# Altium PCB PCB1.PcbDoc
Units mil, origin at the board's own origin, x right, y up, seen from the top; angles counter-clockwise.
Board outline 2755 x 1775 mil, 2 copper layers (Top Layer, Bottom Layer); 43 components, 27 nets, 129 pads, 27 vias.
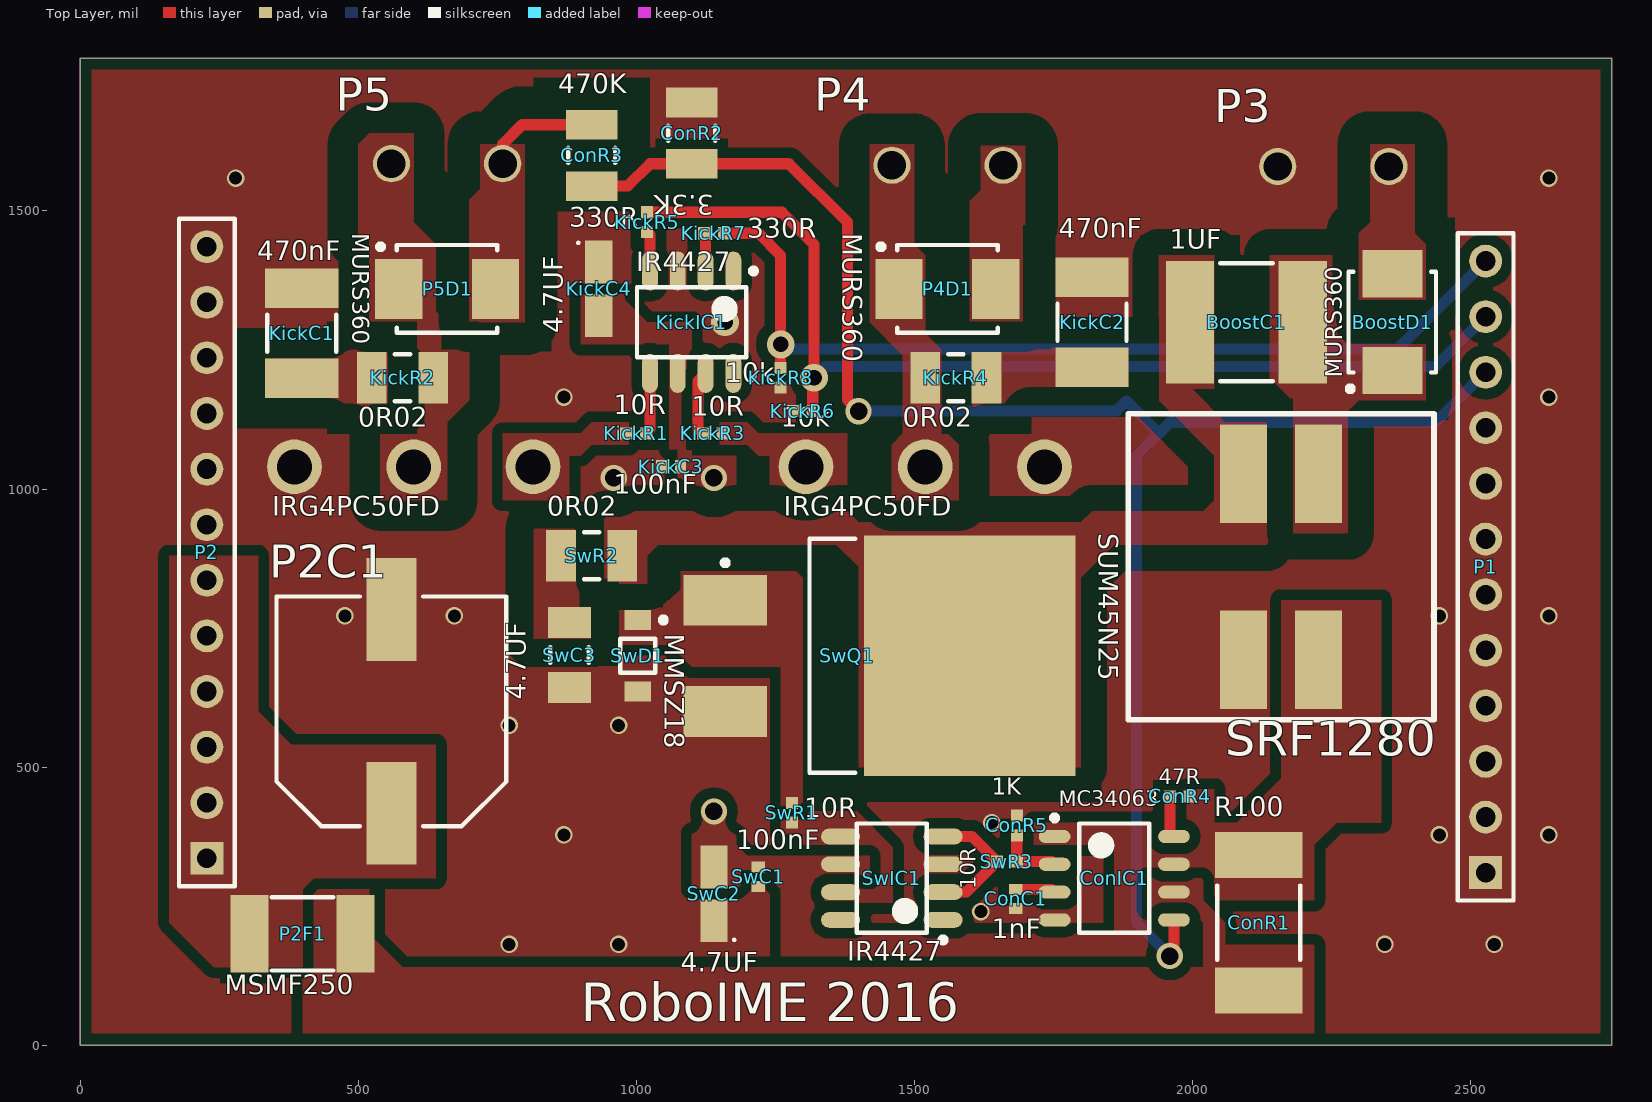
[diagram p0: Top Layer view]
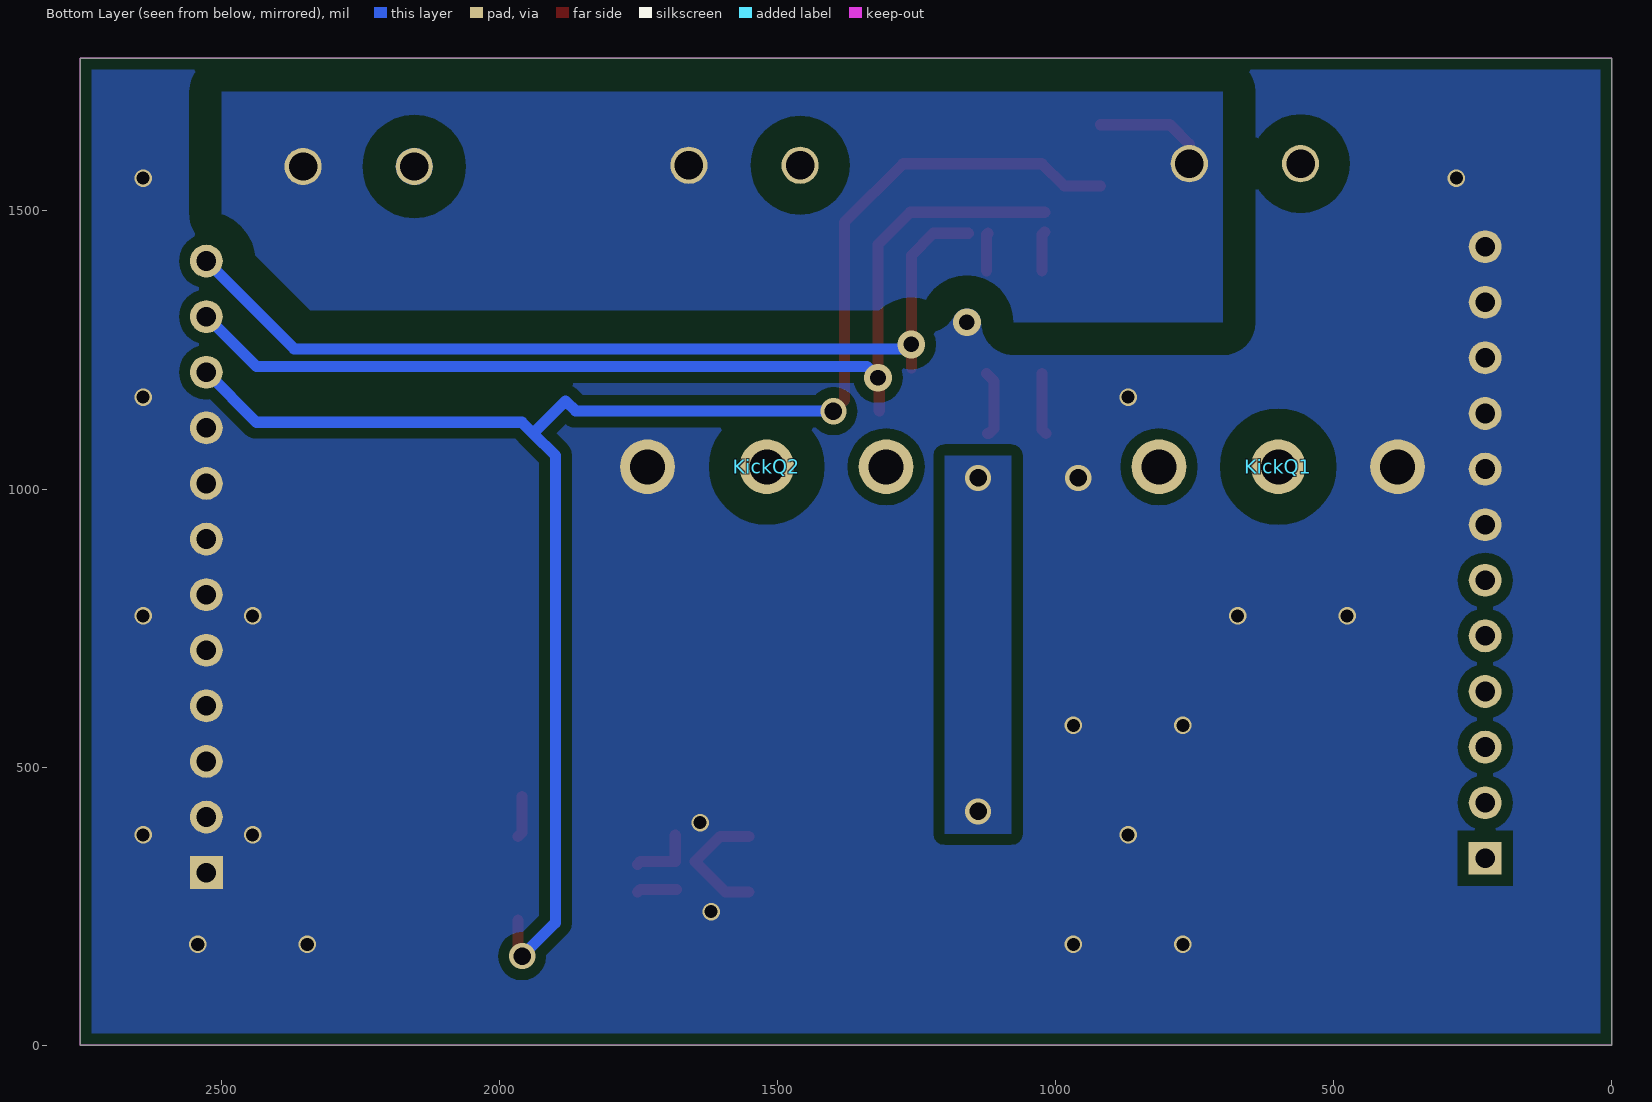
[diagram p1: Bottom Layer view, seen from below]

## Layer stack, top to bottom
Top Solder: solder mask 0.4, Solder Resist, Dk 3.5
Top Layer: signal copper 1.4
Dielectric 1: dielectric 12.6, FR-4, Dk 4.8
Bottom Layer: signal copper 1.4
Bottom Solder: solder mask 0.4, Solder Resist, Dk 3.5

## Board outline
0,0 2755,0 2755,1775 0,1775

## Design rules (kind name [scope] priority, off if disabled: settings)
Clearance Clearance_9 [InNet('KICK_REF')] p1: gap=19.68 ignorepadtopadclearanceinfootprint=FALSE except(0: Arc-Hole Track-Hole SMDPad-Hole THPad-Hole Via-Hole Fill-Hole Poly-Hole Region-Hole Text-Hole)
Clearance Clearance_8 [InNet('NetKickC2_2')] p2: gap=55.12 ignorepadtopadclearanceinfootprint=FALSE except(0: Arc-Hole Track-Hole SMDPad-Hole THPad-Hole Via-Hole Fill-Hole Poly-Hole Region-Hole Text-Hole)
Clearance Clearance_7 [InNet('NetKickC1_2')] p3: gap=55.12 ignorepadtopadclearanceinfootprint=FALSE except(0: Arc-Hole Track-Hole SMDPad-Hole THPad-Hole Via-Hole Fill-Hole Poly-Hole Region-Hole Text-Hole)
Clearance Clearance_6 [InNet('CHIP_KICK-')] p4: gap=55.12 ignorepadtopadclearanceinfootprint=FALSE except(0: Arc-Hole Track-Hole SMDPad-Hole THPad-Hole Via-Hole Fill-Hole Poly-Hole Region-Hole Text-Hole)
Clearance Clearance_5 [InNet('KICK-')] p5: gap=55.12 ignorepadtopadclearanceinfootprint=FALSE except(0: Arc-Hole Track-Hole SMDPad-Hole THPad-Hole Via-Hole Fill-Hole Poly-Hole Region-Hole Text-Hole)
Clearance Clearance_4 [InNet('NetSwC3_2')] p6: gap=51.18 ignorepadtopadclearanceinfootprint=FALSE except(0: Arc-Hole Track-Hole SMDPad-Hole THPad-Hole Via-Hole Fill-Hole Poly-Hole Region-Hole Text-Hole)
Clearance Clearance_3 [InNet('NetBoostC1_1')] p7: gap=47.24 ignorepadtopadclearanceinfootprint=FALSE except(0: Arc-Hole Track-Hole SMDPad-Hole THPad-Hole Via-Hole Fill-Hole Poly-Hole Region-Hole Text-Hole)
Clearance Clearance_2 [InNet('SEPIC')] p8: gap=47.24 ignorepadtopadclearanceinfootprint=FALSE except(0: Arc-Hole Track-Hole SMDPad-Hole THPad-Hole Via-Hole Fill-Hole Poly-Hole Region-Hole Text-Hole)
Clearance [InNet('CAP+')] p9: gap=59.06 ignorepadtopadclearanceinfootprint=FALSE except(0: Arc-Hole Track-Hole SMDPad-Hole THPad-Hole Via-Hole Fill-Hole Poly-Hole Region-Hole Text-Hole)
Clearance Clearance_1 [All] p10: gap=11.81 ignorepadtopadclearanceinfootprint=FALSE except(0: Arc-Hole Track-Hole SMDPad-Hole THPad-Hole Via-Hole Fill-Hole Poly-Hole Region-Hole Text-Hole; 19.68: Arc-Poly Track-Poly SMDPad-Poly THPad-Poly Via-Poly Fill-Poly Poly-Poly Poly-Region Poly-Text)
MinimumSolderMaskSliver [All] p1 off: minsoldermaskwidth=10
PolygonConnect PolygonConnect_1 [InNetClass('DIRECT')] p1: connectstyle=Direct reliefconductorwidth=10 reliefentries=4 polygonreliefangle="90 Angle" airgapwidth=10
PolygonConnect [All] p2: connectstyle=Direct reliefconductorwidth=20 reliefentries=4 polygonreliefangle="90 Angle" airgapwidth=11.81
RoutingVias [All] p1: holewidth=28 width=50 viastyle="Through Hole" minholewidth=28 minwidth=50 maxholewidth=28 maxwidth=50
SilkToSilkClearance [All] p1 off: silktosilkclearance=10
SilkToSolderMaskClearance [IsPad] p1 off: minsilkscreentomaskgap=10 clearancetoexposedcopper=TRUE
SolderMaskExpansion [All] p1: expansion=4
Width [All] p1: maxlimit=30 minlimit=10 preferedwidth=20
27 further rules are at their usual default settings.

## Classes and differential pairs
net class DIRECT: CAP+ CHIP_KICK- GND KICK- NetBoostC1_1 NetP2_1 NetSwC3_2 SEPIC V+ VIN

## Components (designator, comment, footprint, x,y, rotation, side; value= is the part's Value field where it differs from the comment)
BoostC1 "1UF" CAP-2220 2097.64,1300 r0 top
BoostD1 "MURS360" ONSC-SMB-2-403A-03_V 2360,1300 r90 top
ConC1 "1nF" CAP-0402 1682.67,262.68 r90 top
ConIC1 "MC34063" SOIC8-STM 1860,300 r0 top
ConR1 "R100" "RES-2512 BOURNS CRA" 2120,220 r270 top
ConR2 "3.3K" RES-1206 1100,1640 r270 top
ConR3 "470K" RES-1206 920,1600 r90 top
ConR4 "47R" RES-0402 1977.72,447.02 r0 top
ConR5 "1K" RES-0402 1684.64,394.9 r270 top
KickC1 "470nF" "CAP-1812 TDK" 398.73,1280 r270 top
KickC2 "470nF" "CAP-1812 TDK" 1820,1300 r270 top
KickC3 "100nF" CAP-0402 1062.68,1040 r0 top
KickC4 "4.7UF" "CAP Tant 1206 Kemet" 932.51,1360 r90 top
KickIC1 "IR4427" SOIC8-INFINEON 1100,1300 r270 top
KickQ1 "IRG4PC50FD" TO-247AC 600,1040 r180 bottom
KickQ2 "IRG4PC50FD" TO-247AC 1520,1040 r0 bottom
KickR1 "10R" RES-0402 1000,1100 r180 top
KickR2 "0R02" RES-1206 580,1200 r0 top
KickR3 "10R" RES-0402 1137.72,1100 r0 top
KickR4 "0R02" RES-1206 1575.12,1200 r180 top
KickR5 "330R" RES-0402 1020,1480 r270 top value=330
KickR6 "10k" RES-0402 1300,1140 r0 top value=10K
KickR7 "330R" RES-0402 1140,1460 r180 top value=330
KickR8 "10k" RES-0402 1260,1200 r90 top value=10K
P1 "Header 12" HDR1X12 2527.95,310 r90 top
P2 "Header 12" HDR1X12 227.95,335.83 r90 top
P2C1 "EEE-FK1C681GP" "Cap Al Size G - Panasonic" 560,600 r90 top
P2F1 "MSMF250" "1812-MSMF Bourns2" 400,200 r0 top
P3 "Cap" "Term Block 2P" 2254.01,1580 r0 top
P4 "OSTTA024163" "Term Block 2P" 1560,1582.24 r0 top
P4D1 "MURS360" ONSC-SMB-2-403A-03_V 1560,1360 r0 top
P5 "OSTTA024163" "Term Block 2P" 660,1585.15 r0 top
P5D1 "MURS360" ONSC-SMB-2-403A-03_V 660,1360 r0 top
SRF1280 "SRF1280-100M" SRF1280-100M-PCB 2160,860 r180 top
SwC1 "100nF" CAP-0402 1220,302.68 r90 top
SwC2 "4.7UF" "CAP Tant 1206 Kemet" 1140,271.77 r270 top
SwC3 "4.7UF" "CAP-1206 KEMET" 880,701.34 r90 top
SwD1 "MMSZ18" ONSC-SOD-123-2-425-04_V 1003.18,700 r270 top
SwIC1 "IR4427" SOIC8-INFINEON 1460,300 r180 top
SwQ1 "SUM45N25" "TO-263 Vishay" 1406.3,700 r0 top
SwR1 "10R" RES-0402 1280,417.72 r90 top
SwR2 "0R02" RES-1206 920,880 r0 top
SwR3 "10R" RES-0402 1666.92,329.77 r180 top

## Footprints (in the part's own frame and the unit in brackets; to place one, negate y for a bottom-side part, rotate by r counter-clockwise, add the part's x,y. Pads: shape width x height; smd on the part's side, far side on the other; paste and mask are expansions set on the pad)
"1812-MSMF Bourns2" [mm] "Chip Diode, 2-Leads, Body 4,60x3,24mm, IPC Medium Density"
  rect 1.73x3.55 smd: 1(-2.415,0) 2(2.415,0)
  silkscreen extent -1.4,-1.68 1.4,1.68, body extent -2.3,-1.62 2.3,1.62, height 1.15
"Cap Al Size G - Panasonic" [mm] "Aluminum Electrolytic Capacitor, Body 10,30x10,30x10,50mm, IPC Low Density"
  rect 4.7x2.3 smd: 1(-4.65,0) 2(4.65,0)
  silkscreen extent -5.25,-5.25 5.25,5.25, body extent -5.65,-5.21 5.65,5.09, height 10.41
"CAP Tant 1206 Kemet" [mm] "Molded Capacitor, 2-Leads, Body 3,20x1,60mm, IPC Medium Density"
  rect 1.95x1.25 smd: 1(-1.225,0) 2(1.225,0)
  silkscreen extent 2.05,0.87 2.15,0.97, body extent -1.7,-0.9 1.7,0.9, height 1.8
CAP-0402 [mm]
  rect 0.5x0.62 smd: 1(-0.44,0) 2(0.44,0)
  body extent -0.53,-0.28 0.53,0.27, height 0.55
"CAP-1206 KEMET" [mm] "Chip Resistor, 2-Leads, Body 3,20x1,60mm, IPC Medium Density"
  rect 1.42x1.96 smd: 1(-1.49,0) 2(1.49,0)
  silkscreen extent -0.35,-0.88 0.35,0.88, body extent -1.7,-0.9 1.7,0.9, height 1.75
"CAP-1812 TDK" [mm] "Chip Capacitor, 2-Leads, Body 4,60x3,20mm, IPC Medium Density"
  rect 1.8x3.35 smd: 1(-2.05,0) 2(2.05,0)
  silkscreen extent -0.85,-1.58 0.85,1.58, body extent -2.3,-1.6 2.3,1.6, height 3.2
CAP-2220 [mm] "Chip Capacitor, 2-Leads, Body 5,75x5,00mm, IPC Medium Density"
  rect 2.2x5.6 smd: 1(-2.575,0) 2(2.575,0)
  silkscreen extent -1.2,-2.7 1.2,2.7, body extent -3.1,-2.7 3.1,2.7, height 2.5
HDR1X12 [mm] "Connector; Header; 12 Position"
  rect 1.5x1.5 hole 0.9: 1(0,0)
  round 1.5 hole 0.9: 2(2.54,0) 3(5.08,0) 4(7.62,0) 5(10.16,0) 6(12.7,0) 7(15.24,0) 8(17.78,0) 9(20.32,0) 10(22.86,0) 11(25.4,0) 12(27.94,0)
  silkscreen extent -1.27,-1.27 29.21,1.27
ONSC-SMB-2-403A-03_V [mil] "Molded, 2-Leads, Body 4.6x3.95mm"
  rect 85x107.99 smd: 1(-87.01,0) 2(87.01,0)
  silkscreen extent -125,-79 91,81, body extent -91,-78 91,78, height 97
ONSC-SOD-123-2-425-04_V [mm] "SOD, 2-Leads, Body 2.69x1.6mm"
  rect 0.91x1.22 smd: 1(-1.635,0) 2(1.635,0)
  silkscreen extent -1.76,-0.8 0.78,1.29, body extent -1.35,-0.8 1.35,0.8, height 1.35
RES-0402 [mm]
  rect 0.55x0.55 smd: 1(-0.45,0) 2(0.45,0)
  body extent -0.53,-0.27 0.53,0.28, height 0.4
RES-1206 [mm]
  rect 1.35x2.35 smd: 1(-1.4,0) 2(1.4,0)
  silkscreen extent -0.35,-1.08 0.35,1.07, body extent -1.73,-0.67 1.73,0.67, height 0.45
"RES-2512 BOURNS CRA" [mm] "Chip Resistor, 2-Leads, Body 6,45x3,35mm, IPC Medium Density"
  rect 2.1x4 smd: 1(-3.1,0) 2(3.1,0)
  silkscreen extent -1.7,-1.9 1.7,1.9, body extent -3.32,-1.57 3.33,1.58, height 0.9
SOIC8-INFINEON [mm] "SOIC, 8-Leads, Body 4,89x3,90mm, Pitch 1,27mm, IPC Medium Density"
  oval 1.78x0.72 smd: 1(-2.34,1.905) 2(-2.34,0.635) 3(-2.34,-0.635) 4(-2.34,-1.905) 5(2.34,-1.905) 6(2.34,-0.635) 7(2.34,0.635) 8(2.34,1.905)
  silkscreen extent -2.46,-2.5 1.6,2.94, body extent -2,-2.5 2,2.5, height 1.75
SOIC8-STM [mm] "SOIC, 8-Leads, Body 4,90x3,90mm, Pitch 1,27mm, IPC Medium Density"
  oval 1.45x0.6 smd: 1(-2.725,1.905) 2(-2.725,0.635) 3(-2.725,-0.635) 4(-2.725,-1.905) 5(2.725,-1.905) 6(2.725,-0.635) 7(2.725,0.635) 8(2.725,1.905)
  silkscreen extent -2.85,-2.5 1.6,2.88, body extent -2,-2.5 2,2.5, height 1.75
SRF1280-100M-PCB [mm]
  rect 2.15x4.5 smd: 1(1.715,4.25) 2(-1.715,4.25) 3(-1.715,-4.25) 4(1.715,-4.25)
  silkscreen extent -6.99,-6.99 6.99,6.99, body extent -6.25,-6.12 6.25,6.38, height 7.8
"Term Block 2P" [mm]
  round 1.7 hole 1.3: 1(-2.54,0) 2(2.54,0)
  body extent -5.64,-3.1 4.96,4.5, height 10
TO-247AC [mm]
  round 2.5 hole 1.6: 1(-5.45,0) 2(0,0) 3(5.45,0)
  body extent -7.75,-24.89 7.75,0.51, height 8
"TO-263 Vishay" [mm] "D2-PAK, 3-Pads, Body 7,93x8,69mm (max), IPC Medium Density"
  rect 3.81x2.32 smd: 1(-6.25,2.54) 3(-6.25,-2.54)
  rect 9.65x11 smd: 2(4.92,0)
  silkscreen extent -6.37,-5.35 -0.31,5.35, body extent -6.5,-4.91 8.09,4.91, height 4.22

## Part data
BoostC1: library part "Cap 1UF 2220 450V", "1µF 450V Ceramic Capacitor X7T 2220 (5750 Metric) 0.224\" L x 0.197\" W (5.70mm x 5.00mm)"
BoostD1 P4D1 P5D1: library part CMP-0902-00327-1, "Surface Mount Ultrafast Power Rectifier, 2-Pin SMB, Pb-Free, Tape and Reel"
ConC1: library part "Cap 1nF 0402", "1000pF 50V Ceramic Capacitor X7R 0402 (1005 Metric) 0.039\" L x 0.020\" W (1.00mm x 0.50mm)"
ConIC1: library part MC34063ACD, "Buck, Boost Switching Regulator IC Positive or Negative Adjustable 1.25V 1 Output 1.5A (Switch) 8-SOIC (0.154\", 3.90mm Width)"
ConR1: library part "RES 0R1 2512", "RES SMD 0.1 OHM 1% 3W 2512"
ConR2: library part "RES 3.3K 1206", "RES SMD 3.3K OHM 5% 1/4W 1206"
ConR3: library part "RES 470K 1206", "RES SMD 470K OHM 1% 1/4W 1206"
ConR4: library part "RES 47 0402", "RES SMD 47 OHM 5% 1/16W 0402"
ConR5: library part "RES 1K 0402", "RES SMD 1K OHM 5% 1/16W 0402"
KickC1 KickC2: library part "Cap 470nF 250V 1812", "0.47µF 250V Ceramic Capacitor X7R 1812 (4532 Metric) 0.177\" L x 0.126\" W (4.50mm x 3.20mm)"
KickC3 SwC1: library part "Cap 100nF 0402", "0.10µF 16V Ceramic Capacitor X7R 0402 (1005 Metric) 0.039\" L x 0.020\" W (1.00mm x 0.50mm)"
KickC4 SwC2: library part "Cap Tant 4,7UF 1206", "4.7µF Molded Tantalum Capacitors 25V 1206 (3216 Metric) 6 Ohm 0.126\" L x 0.063\" W (3.20mm x 1.60mm)"
KickIC1 SwIC1: "IC DRIVER DUAL LOW SIDE 8SOIC"
KickQ1 KickQ2: "IGBT 600V 70A 200W TO247AD"
KickR1 KickR3 SwR1 SwR3: library part "RES 10 0402", "RES SMD 10 OHM 5% 1/16W 0402"
KickR2 KickR4 SwR2: library part "RES 0R02 1206", "RES SMD 0.02 OHM 1% 1/4W 1206"
KickR5 KickR7: library part "RES 330 0402", "RES SMD 330 OHM 5% 1/16W 0402"
KickR6 KickR8: library part "RES 10K 0402", "RES SMD 10K OHM 5% 1/16W 0402"
P1 P2: "Header, 12-Pin"
P2C1: library part "CAP AL 680UF/16V", "Aluminum Electrolytic Capacitors - SMD Al Lytic Cap SMT FK Series 105C"
P2F1: library part MF-MSMF250/16X, "PTC RESETTABLE"
P3 P4 P5: library part "Term Block 2P", "2 Position Wire to Board Terminal Block Horizontal with Board 0.200\" (5.08mm) Through Hole"
SRF1280: "Shielded 2 Coil Inductor Array 40µH Inductance - Connected in Series 10µH Inductance - Connected in Parallel 24.1 mOhm Max DC Resistance (DCR) - Parallel 6.04A Nonstandard"
SwC3: library part "Cap 470nF 50V 1206", "0.47µF 50V Ceramic Capacitor X8L 1206 (3216 Metric) 0.126\" L x 0.063\" W (3.20mm x 1.60mm)"
SwD1: library part CMP-1060-00279-1, "Zener Voltage Regulator, 500 mW, 2-Pin SOD-123, Pb-Free, Tape and Reel"
SwQ1: "MOSFET N-CH 250V 45A D2PAK"

## Via types
v1: diameter 31.5, hole 23.62, Top Layer to Bottom Layer, 19 vias
v2: diameter 47.24, hole 31.5, Top Layer to Bottom Layer, 5 vias
v3: diameter 50, hole 28, Top Layer to Bottom Layer, 3 vias

## Nets (pads, with @x,y where several pads share a name; then routed paths per layer and width w, separated by ;. In a path a pad name is that pad's centre, name@x,y a point inside that pad or via, vN(x,y) a via of type N, cw(c..) or ccw(c..) an arc to the next point about the centre after c; other vN are vias at no path point)
CAP+: BoostD1.2 ConR3.2 P3.2 P4.2 P4D1.2 P5.2 P5D1.2 | length 216.7
  Top Layer w20: P5.2@765.15,1580 P5.2 760,1620 795.12,1655.12 ConR3.2
CHIP_KICK: KickR7.1 KickR8.2 P1.12 | length 1658
  Top Layer w20: KickR7.1 1220,1460 1260,1420 v3(1260,1260) KickR8.2
  Bottom Layer w20: v3(1260,1260) 1268.19,1251.81 2369.76,1251.81 P1.12
CHIP_KICK-: KickQ1.2 KickR2.2 P5.1 P5D1.1
GND: ConC1.1 ConIC1.4 ConR2.1 ConR5.1 KickC1.1 KickC2.1 KickC3.1 KickC4.2 KickIC1.3 KickQ1.3 KickQ2.3 KickR6.1 KickR8.1 P1.1 P1.2 P1.3 P1.4 P1.5 P1.6 P1.7 P1.8 P1.9 P2.7 P2.8 P2.9 P2.10 P2.11 P2.12 P2C1.2 P3.1 SRF1280.1 SwC1.1 SwC2.2 SwC3.1 SwD1.2 SwIC1.3 SwQ1.3
  other v1: 771.65,181.1 968.5,181.1 2346.46,181.1 2543.31,181.1 1620,240 870.08,377.95 2444.88,377.95 2641.73,377.95 1640,400 771.65,574.8 968.5,574.8 476.38,771.65 673.23,771.65 2444.88,771.65 2641.73,771.65 870.08,1165.35 2641.73,1165.35 279.53,1559.06 2641.73,1559.06
  other v2: 960,1020
  other v3: 1160,1300
KICK: KickR5.1 KickR6.2 P1.11 | length 1878.4
  Top Layer w20: KickR5.1 1262.28,1497.72 1320,1440 v3(1320,1200) 1317.72,1197.72 KickR6.2
  Bottom Layer w20: v3(1320,1200) 1340,1220 2437.95,1220 P1.11
KICK-: KickQ2.2 KickR4.2 P4.1 P4D1.1
KICK_REF: ConIC1.5 ConR2.2 ConR3.1 P1.10 | length 3123
  Top Layer w20: ConR3.1 984.88,1544.88 1024.88,1584.88 ConR2.2 1275.12,1584.88 1380,1480 1380,1160 v2(1400,1140) ; v2(1960,160) 1967.28,167.28 ConIC1.5
  Bottom Layer w20: v2(1400,1140) 1863.46,1140 1881.73,1158.27 1940,1100 ; v2(1960,160) 1900,220 1900,1060 1940,1100 ; P1.10 2437.95,1120 1960,1120 1940,1100
NetBoostC1_1: BoostC1.1 SRF1280.4 SwQ1.2 SwR2.2
NetConC1_2: ConC1.2 ConIC1.3 | length 72.1
  Top Layer w20: ConC1.2 1747.72,280 ConIC1.3
NetConIC1_8: ConIC1.8 ConR4.1 | length 75
  Top Layer w20: ConR4.1 1960,382.28 ConIC1.8
NetKickC1_2: KickC1.2 KickR2.1
NetKickC2_2: KickC2.2 KickR4.1
NetKickIC1_2: KickIC1.2 KickR7.2 | length 69
  Top Layer w20: KickR7.2 1125,1457.28 KickIC1.2
NetKickIC1_4: KickIC1.4 KickR5.2 | length 72.2
  Top Layer w20: KickR5.2 1025,1457.28 KickIC1.4
NetKickIC1_5: KickIC1.5 KickR1.1 | length 110.9
  Top Layer w20: KickR1.1 1025,1107.28 KickIC1.5
NetKickIC1_7: KickIC1.7 KickR3.1 | length 120.2
  Top Layer w20: KickR3.1@1122.8,1100 KickR3.1 1110.98,1109.02 1110.98,1193.86 KickIC1.7
NetKickQ1_1: KickQ1.1 KickR1.2
NetKickQ2_1: KickQ2.1 KickR3.2
NetP2_1: P2.1 P2.2 P2.3 P2.4 P2.5 P2.6 P2C1.1 P2F1.1
NetSwC3_2: SwC3.2 SwR2.1
NetSwD1_1: SwD1.1 SwQ1.1 SwR1.2
NetSwIC1_2: SwIC1.2 SwIC1.4 SwR3.2 | length 235.6
  Top Layer w20: SwIC1.2 1594.43,275 SwR3.2 1603.98,375 SwIC1.4
NetSwIC1_5: SwIC1.5 SwIC1.7 SwR1.1
SEPIC: BoostC1.2 BoostD1.1 SRF1280.3
SW_CON: ConIC1.2 ConR5.2 SwR3.1 | length 117.5
  Top Layer w20: ConR5.2 SwR3.1 1747.94,329.77 ConIC1.2
V+: ConIC1.1 ConIC1.7 ConR1.1 ConR4.2 KickC3.2 KickC4.1 KickIC1.6 SRF1280.2 SwC1.2 SwC2.1 SwIC1.6
  other v2: 1140,420 1140,1020
VIN: ConIC1.6 ConR1.2 P2F1.2
pads on no net: KickIC1.1 KickIC1.8 SwIC1.1 SwIC1.8

## Polygon pours and split planes (outlines as drawn)
NetKickC1_2 on Top Layer "Top Layer-No Net" (solid, remove dead copper, pour order 66): 580,1260 580,1140 480,1140 460,1160 320,1160 320,1240 460,1240 480,1260
NetKickC2_2 on Top Layer "Top Layer-No Net" (solid, remove dead copper, pour order 60): 1900,1260 1900,1180 1700,1180 1740,1180 1700,1140 1600,1140 1600,1260
V+ on Top Layer "Top Layer-No Net" (solid, remove dead copper, pour order 46): 1060,1060 1180,1060 1180,980 1100,980 1100,1000 1080,1020 1060,1020
V+ on Top Layer "Top Layer-No Net" (solid, remove dead copper, pour order 42): 1100,260 1180,260 1180,460 1100,460
GND on Top Layer "Top Layer-No Net" (solid, remove dead copper, pour order 40): 0,1820 0,0 2800,0 2800,1820
NetKickQ2_1 on Top Layer "Top Layer-No Net" (solid, remove dead copper, pour order 32): 1380,1100 1380,980 1240,980 1240,1060 1220,1060 1200,1080 1140,1080 1140,1120 1200,1120 1220,1100
V+ on Top Layer "Top Layer-No Net" (solid, remove dead copper, pour order 34): 1100,1260 1100,1020 1060,1020 1060,1160 1060,1260 980,1260 900,1260 900,1360 980,1360 980,1340 1020,1300 1100,1300
CAP+ on Top Layer "Top Layer-No Net" (solid, remove dead copper, pour order 1): 1700,1617.09 1700,1537.09 1700,1297.09 1600,1297.09 1600,1517.09 1620,1537.09 1620,1617.09
CAP+ on Top Layer "Top Layer-No Net" (solid, remove dead copper, pour order 2): 800,1620 800,1540 800,1300 700,1300 700,1520 720,1540 720,1620
CAP+ on Top Layer "Top Layer-No Net" (solid, remove dead copper, pour order 0): 2420,1340 2300,1340 2300,1460 2320,1480 2320,1620 2400,1620 2400,1460 2420,1440
KICK- on Top Layer "Top Layer-No Net" (solid, remove dead copper, pour order 3): 1420,1620 1500,1620 1500,1520 1500,1440 1520,1420 1520,1280 1560,1240 1560,1100 1580,1080 1580,980 1460,980 1460,1080 1480,1100 1480,1140 1480,1240 1420,1300
CHIP_KICK- on Top Layer "Top Layer-No Net" (solid, remove dead copper, pour order 4): 540,980 660,980 660,1120 700,1160 700,1260 640,1320 640,1420 640,1440 600,1480 600,1640 520,1640 500,1620 500,1280 580,1280 620,1240 620,1120 600,1100 540,1100
NetBoostC1_1 on Top Layer "Top Layer-No Net" (solid, remove dead copper, pour order 11): 2140,900 1860,900 1800,840 1800,500 1400,500 1400,860 1360,900 1040,900 1020,880 1020,820 940,820 940,960 1380,960 1400,940 1800,940 1820,960 2020,960 2040,980 2040,1060 1940,1160 1940,1420 2040,1420 2040,1180 2000,1180 2060,1120 2140,1120
SEPIC on Top Layer "Top Layer-No Net" (solid, remove dead copper, pour order 10): 2180,920 2280,920 2280,1140 2300,1160 2420,1160 2420,1260 2280,1260 2260,1280 2260,1420 2140,1420 2140,1200 2180,1160
V+ on Top Layer "Top Layer-No Net" (solid, remove dead copper, pour order 9): 2220,260 2220,360 2260,400 2340,400 2340,800 2160,800 2160,480 2080,400 2040.07,400 2040.07,460 1980,460 1980,400 1860,400 1700,400 1700,360 1860,360 1860,200 1320,200 1320,300 1420,300 1420,340 1200,340 1180,360 1180,380 1100,380 1100,260 1180,260 1180,280 1200,300 1240,300 1260,280 1260,140 1920,140 1920,300 2020,300 2020,260
VIN on Top Layer "Top Layer-No Net" (solid, remove dead copper, pour order 8): 400,280 520,280 520,200 580,140 2020,140 2020,180 2020,220 2000,240 1920,240 1920,300 2020,300 2020,280 2020,260 2060,220 2060,180 2120,180 2220,180 2220,20 400,20
NetP2_1 on Top Layer "Top Layer-No Net" (solid, remove dead copper, pour order 7): 160,880 320,880 320,600 380,540 640,540 640,300 420,300 400,280 400,140 240,140 160,220
NetKickQ1_1 on Top Layer "Top Layer-No Net" (solid, remove dead copper, pour order 24): 760,1100 760,980 880,980 880,1060 900,1060 920,1080 960,1080 1000,1080 1000,1120 920,1120 900,1100
NetSwIC1_5 on Top Layer "Top Layer-No Net" (solid, remove dead copper, pour order 26): 1260,380 1260,420 1397.45,420 1461.83,355.62 1461.83,255.62 1321.83,255.62 1321.83,295.62 1401.83,295.62 1421.83,315.62 1421.83,355.62 1300,355.62 1300,380
NetSwD1_1 on Top Layer "Top Layer-No Net" (solid, remove dead copper, pour order 28): 960,720 960,800 1060,800 1080,820 1080,860 1280,860 1300,840 1300,424.41 1260,424.41 1260,680 1100,680 1060,720
NetSwC3_2 on Top Layer "Top Layer-No Net" (solid, remove dead copper, pour order 30): 918.66,730.63 918.66,807.97 896,830.63 896,945.31 816,945.31 816,730.63
CAP+ on Bottom Layer "Top Layer-No Net" (solid, remove dead copper, pour order 5): 2500,1800 2500,1300 700,1300 700,1800
V+ on Bottom Layer "Top Layer-No Net" (solid, remove dead copper, pour order 6): 1200,380 1080,380 1080,1060 1200,1060
GND on Bottom Layer "Top Layer-No Net" (solid, remove dead copper, pour order 38): 0,1800 0,0 2800,0 2800,1800

## Keep-outs
Keep-Out Layer:
  the board outline again, w1.97

## Silkscreen, mask and mechanical layers (free items; w line width, h text height)
Top Overlay:
  text "RoboIME 2016" at 900,20 h118.11